# Altium PCB LED_PROJECT.PcbDoc
Units mil, origin at the board's own origin, x right, y up, seen from the top; angles counter-clockwise.
Board outline 1640 x 1140 mil, 2 copper layers (Top Layer, Bottom Layer); 7 components, 6 nets, 25 pads, 3 vias.
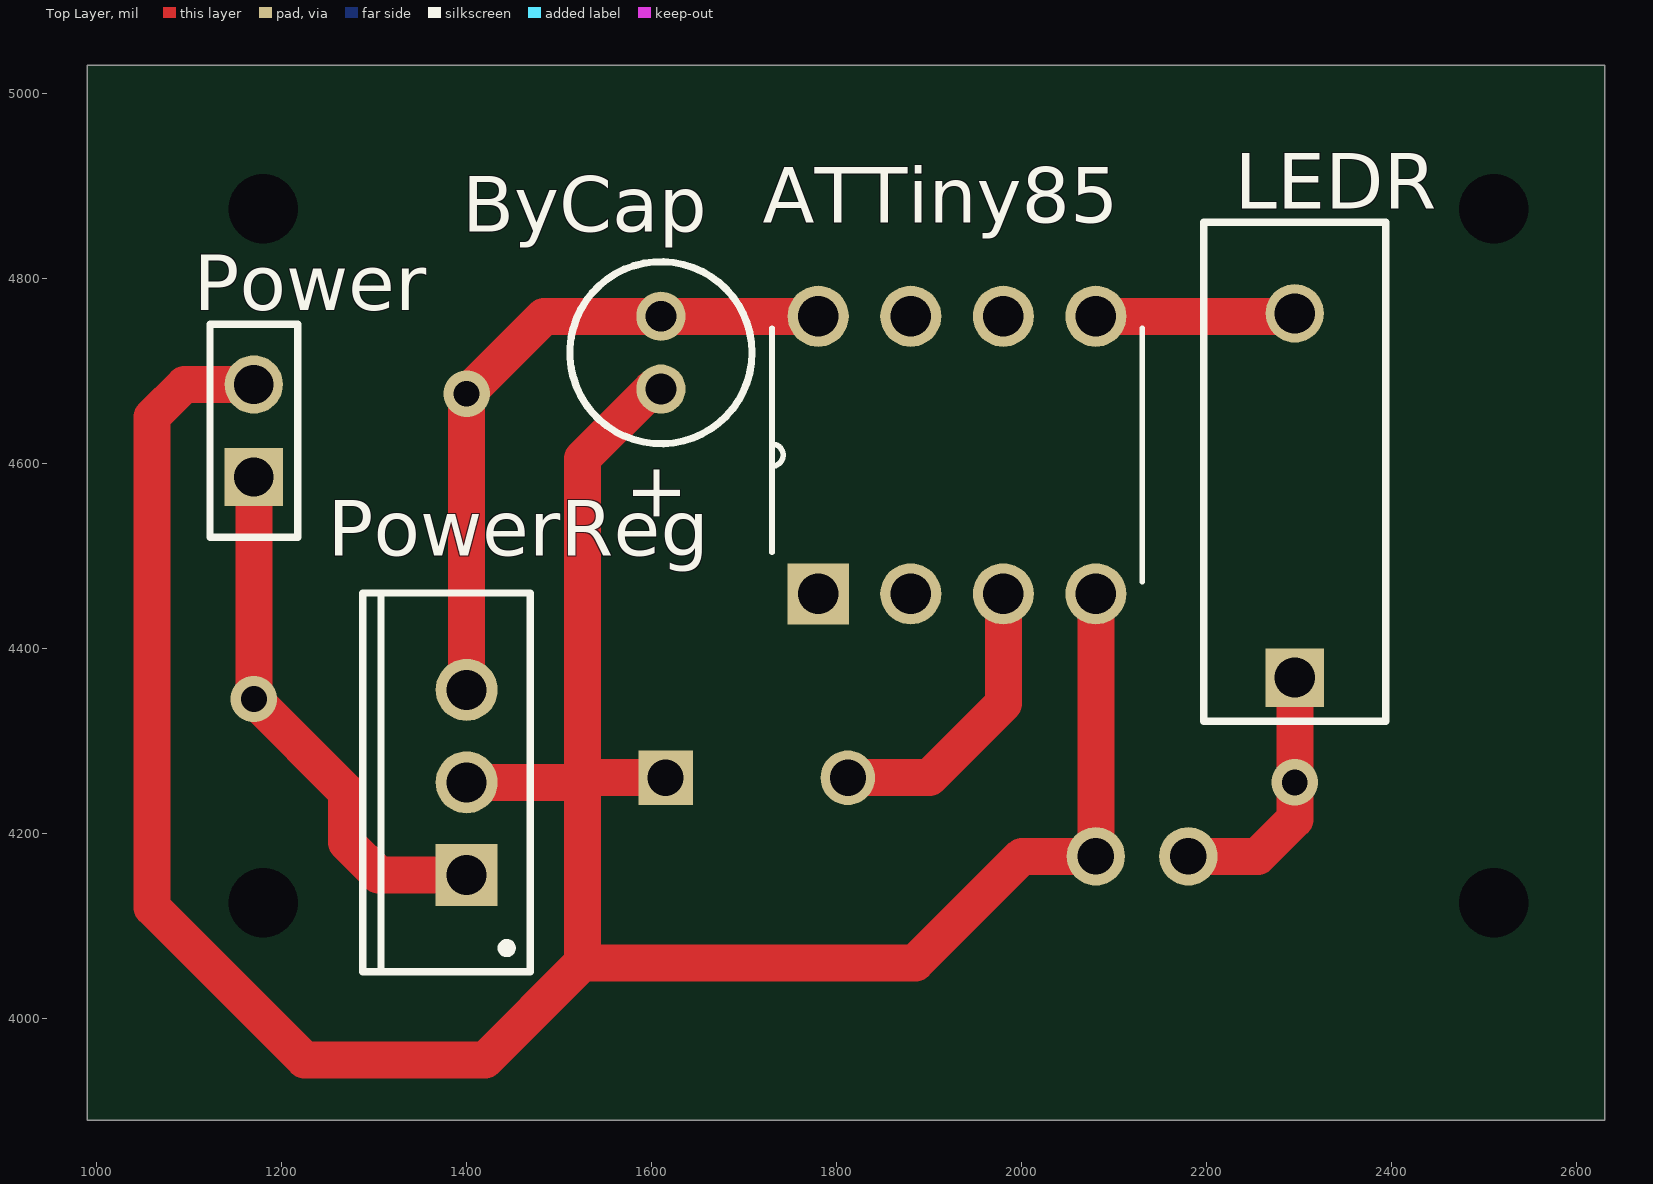
[diagram p0: Top Layer view]
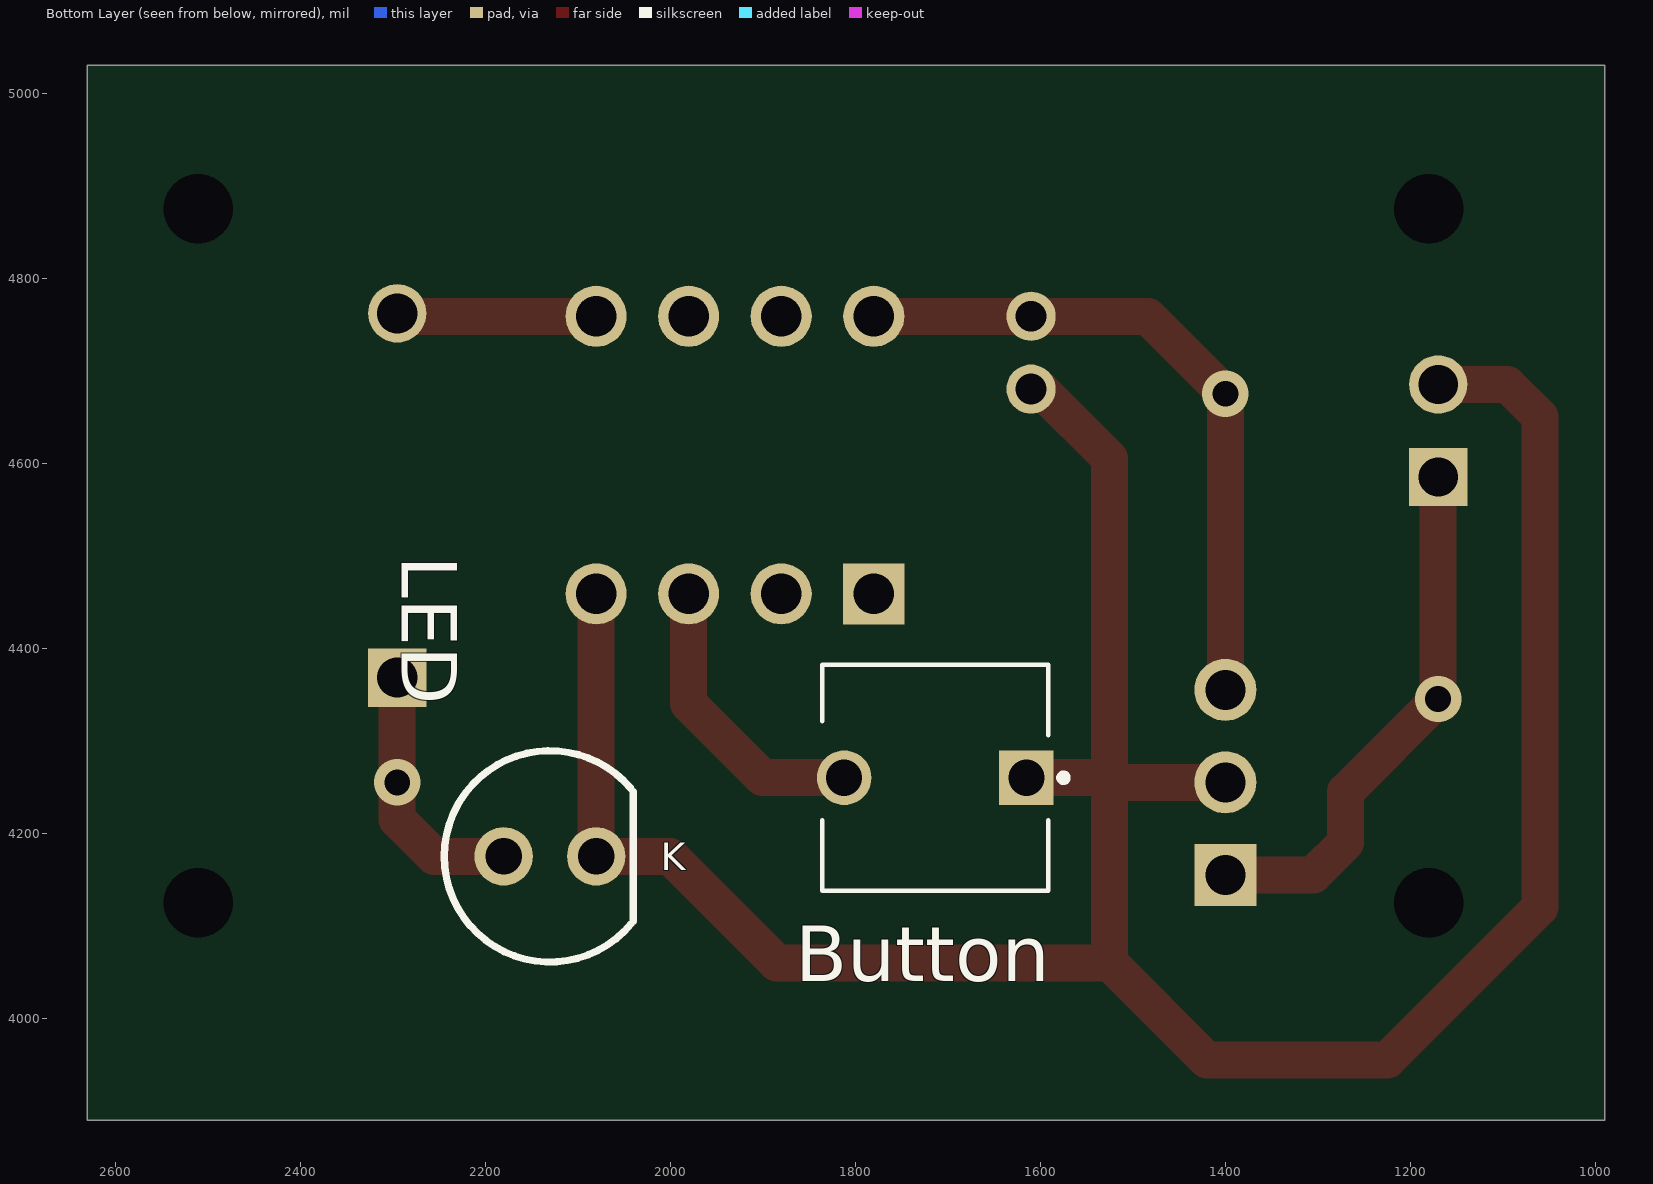
[diagram p1: Bottom Layer view, seen from below]

## Layer stack, top to bottom
Top Solder: solder mask 0.4, Solder Resist, Dk 3.5
Top Layer: signal copper 1.4
Dielectric 1: dielectric 12.6, FR-4, Dk 4.8
Bottom Layer: signal copper 1.4
Bottom Solder: solder mask 0.4, Solder Resist, Dk 3.5

## Board outline
990,5030 2630,5030 2630,3890 990,3890
cut-out: 940,3925
cut-out: 3040,3835

## Design rules (kind name [scope] priority, off if disabled: settings)
Clearance [All] p1: gap=10 ignorepadtopadclearanceinfootprint=FALSE except(0: Arc-Hole Track-Hole SMDPad-Hole THPad-Hole Via-Hole Fill-Hole Poly-Hole Region-Hole Text-Hole)
PolygonConnect [All] p1: connectstyle=Direct reliefconductorwidth=10 reliefentries=4 polygonreliefangle="90 Angle" airgapwidth=10
RoutingVias [All] p1: holewidth=28 width=50 viastyle="Through Hole" minholewidth=28 minwidth=50 maxholewidth=28 maxwidth=50
SolderMaskExpansion [All] p1: expansion=4
Width [All] p1: maxlimit=50 minlimit=20 preferedwidth=20 minimp=50.000000 maximp=50.000000 favimp=50.000000
30 further rules are at their usual default settings.

## Components (designator, comment, footprint, x,y, rotation, side; value= is the part's Value field where it differs from the comment)
ATTiny85 "ATTINY85-20PU" DIP254P762X533-8 2080,4758.74 r90 top
Button "147694-1" TE_FSM8JRT 1615,4260 r0 bottom
ByCap "81R0LFJ0511WPN081T" FHTE-8-0511-2_M 1610,4719.37 r270 top
LED "151053RS03000" "Type 5mm" 2130,4175 r180 bottom
LEDR "FMP300FRF73-82K" YAGO-FMP300-2_V2 2295,4565 r90 top
Power "PHF-102-01-L-S-002" SMTC-PHF-102-01-X-S-002 1170,4585 r90 top
PowerReg "L7805ACV" TO220 1400,4255 r90 top

## Footprints (in the part's own frame and the unit in brackets; to place one, negate y for a bottom-side part, rotate by r counter-clockwise, add the part's x,y. Pads: shape width x height; smd on the part's side, far side on the other; paste and mask are expansions set on the pad)
DIP254P762X533-8 [mil]
  rect 66x66 hole 44: 1(-300,300)
  round 66 hole 44: 2(-300,200) 3(-300,100) 4(-300,0) 5(0,0) 6(0,100) 7(0,200) 8(0,300)
  silkscreen extent -287,-50 -13,350
FHTE-8-0511-2_M [mm] "Through Hole Cap, 2-Leads, Dia 5mm, Body Length 11mm, IPC Low Density"
  round 1.35 hole 0.85: 2(-1,0) 2(1,0)
  silkscreen extent -2.5,-2.5 2.5,2.5, body extent -2.5,-2.5 2.5,2.5, height 11
SMTC-PHF-102-01-X-S-002 [mm] "Press Fit Socket Assembly, 1x2 Pins, Vertical, 2.54mm Pitch, Female"
  rect 1.6x1.6 hole 1.081: 1(0,0)
  round 1.6 hole 1.081: 2(2.54,0)
  silkscreen extent -1.65,-1.2 4.19,1.2, body extent -1.52,-1.21 4.06,1.21, height 8.51
TE_FSM8JRT [mil]
  rect 59x59 hole 39: 2(0,0)
  round 59 hole 39: 2(197,0)
  silkscreen extent -44,-122 220,122
TO220 [mm] "TO, Thru-Hole, Vertical, Heatsink Mounted; 3 In-Line Leads; Pitch 2.54 mm"
  rect 1.7x1.7 hole 1.1: 1(-2.54,0)
  round 1.7 hole 1.1: 2(0,0) 3(2.54,0)
  silkscreen extent -5.2,-1.75 5.2,2.85, body extent -5.25,-1.8 5.25,2.9, height 19.7
"Type 5mm" [mm] "THT, LED-5mm, 2pin- Body 5.8mm"
  round 1.6 hole 1: 2(-1.27,0) 2(1.27,0)
  silkscreen extent -2.9,-2.9 2.29,2.9, body extent -2.9,-2.9 2.5,2.9, height 11.7
YAGO-FMP300-2_V2 [mm] "Through Hole, 2-Leads, Dia 5mm, Body Length 15.5mm, Pin Spacing 10mm"
  rect 1.6x1.6 hole 1.1: 1(-5,0)
  round 1.6 hole 1.1: 2(5,0)
  silkscreen extent -6.2,-2.5 7.5,2.5, body extent -5.4,-2.49 7.49,2.5, height 17.9

## Part data
ATTiny85: "ATtiny Series 20 MHz 8 KB Flash 512 B SRAM 8-Bit Microcontroller - DIP-8", Package="DIP-8 Microchip", Availability=Unavailable, MF=Microchip, MP=ATTINY85-20PU, Price=None, SnapEDA_Link=https://www.snapeda.com/parts/ATTINY85-20PU/Microchip/view-part/?ref=snap
Button: library part FSM8JRT, "FSM8JRT=SWITCH,PUSHBUTTON,TACT", Contact_Current_Rating="50 mA", Package=None, Configuration_Pole-Throw="Single Pole - Single Throw", Digi-Key_Part_Number=450-2039-1-ND, Digi-Key_Purchase_URL=https://www.digikey.com/product-detail/en/te-connectivity-alcoswitch-switches/FSM8JRT/450-2039-1-ND/4146916?utm_source=snapeda&utm_medium=aggregator&utm_campaign=symbol, EU_RoHS_Compliance=Compliant, MF="TE Connectivity", MP=FSM8JRT, SnapEDA_Link=https://www.snapeda.com/parts/FSM8JRT/TE%20Connectivity%20ALCOSWITCH%20Switches/view-part/?ref=snap, TE_purchase_URL=https://www.te.com/usa-en/product-147694-1.html?te_bu=Cor&te_type=disp&te_campaign=seda_glo_cor-seda-global-disp-prtnr-fy19-seda-model-bom-cta_sma-317_1&elqCampaignId=32493
ByCap: library part CMP-0909-00001-1, "Aluminum Electrolytic Capacitor, 1 uF +/- 5%, 50 V, -40 to 105 degC, 2 Pin THD, Dia 5 mm, Body Length 11 mm, Tape and Reel", Manufacturer="Fenghuang Technology", Nominal Capacitance="1 uF", Operating Temperature="-40 to 105 degC", Seeve Color=Balck, Tolerance="+/- 5%", Voltage="50 V", ComponentLink1Description="Manufacturer URL", ComponentLink1URL=http://www.fenghua-advanced.com/, ComponentLink2Description=Datasheet, ComponentLink2URL=http://218.15.223.226:8089/BusinessProductPdf/ss_20130228152314.pdf, DatasheetVersion=Feb-13, Mounting Technology="Through Hole", PackageDescription="2-Pin Through Hole Cap, Dia 5 mm, Body Length 11 mm", PackageReference=8-0511-2, Packing="Tape and Reel", PartNumber=81R0LFJ0511WPN081T
LED: library part CMP-1489-00007-1, "THT LED round mono-color waterclear,  WL-TMRW ,Red", Emitting color=Red, Manufacturer="Wuerth Elektronik", ComponentLink1Description="Manufacturer URL", ComponentLink1URL=http://www.we-online.com, ComponentLink2Description=Datasheet, ComponentLink2URL=http://katalog.we-online.de/pbs/datasheet/7448042001.pdfhttp://katalog.we-online.de/pbs/datasheet/7448042001.pdfhttp://katalog.we-online.de/pbs/datasheet/7448042001.pdfhttp://katalog.we-online.de/pbs/datasheet/151053RS03000.pdf, PackageReference="Type 5mm", PartNumber=151053RS03000
LEDR: library part CMP-1257-00001-1, "Metal Film Resistor, 82 KOhm +/-1%, 3 W, -55 to 155 degC, 2-Pin THD, RoHS, Tape and Reel", Manufacturer=Yageo, Operating Temperature="-55 to 155 degC", Overload Voltage="1000 V Max.", Rated Power="3 W", Resistance="82 KOhm", Resistance Tolerance=+/-1%, Working Voltage="750 V Max.", ComponentLink1Description="Manufacturer URL", ComponentLink1URL=http://www.yageo.com/NewPortal/_en/index.jsp, ComponentLink2Description=Datasheet, ComponentLink2URL=http://www.yageo.com/documents/recent/Yageo%20LR_FMP_2013.pdf, ComponentLink3Description="Package Specification", ComponentLink3URL=http://www.yageo.com/documents/recent/Yageo%20LR_FMP_2013.pdf, DatasheetVersion=Apr-13, Mounting Technology="Through Hole", PackageDescription="2-Pin Axial Lead, Body 15.5 x 5 mm, Lead Spread 33 mm", Packing="Tape and Reel", PartNumber=FMP300FRF73-82K, RoHS=TRUE
Power: library part CMP-1023-00103-1, "Press Fit Socket, Through-hole, Vertical, -55 to 125 degC, 2.54 mm Pitch, 2-Pin, Female, RoHS", Manufacturer=Samtec, Temperature Range="-55 to 125 degC", ComponentLink1Description="Manufacturer URL", ComponentLink1URL=http://www.samtec.com, ComponentLink2Description=Datasheet, ComponentLink2URL=http://www.samtec.com/documents/webfiles/pdf/phf.pdf, ComponentLink3Description="Package Specification", ComponentLink3URL=http://www.samtec.com/documents/webfiles/cpdf/PHF-1XX-XX-X-X-XXX-MKT.pdf, DatasheetVersion=F-214, Mounting Technology=Through-hole, Orientation=Vertical, PackageDescription=".100 Press Fit Socket Assembly", PackageReference=PHF-102-01-X-S-002, PackageVersion="F, 9/2009", PartNumber=PHF-102-01-L-S-002, Pitch="2.54 mm", RoHS=True
PowerReg: library part CMP-0244-00484-1, "Positive Voltage Regulator, 5V, 3-Pin TO-220", ComponentLink1Description="Manufacturer URL", ComponentLink1URL=http://www.st.com, ComponentLink2Description=Datasheet, ComponentLink2URL=http://www.st.com/internet/com/TECHNICAL_RESOURCES/TECHNICAL_LITERATURE/DATASHEET/CD00000444.pdf, ComponentLink3Description="Package Specification", ComponentLink3URL=http://www.st.com/internet/com/TECHNICAL_RESOURCES/TECHNICAL_LITERATURE/PACKAGE_INFORMATION/CD00004649.pdf, DatasheetVersion=16/11/2011, PackageDescription="TO, Thru-Hole, Vertical, Heatsink Mounted; 3 In-Line Leads; Pitch 2.54 mm", PackageReference=TO220, PackageVersion=ver3.0

## Free pads (board coordinates)
  round 60 hole 75: 2(1180,4125) 2(1180,4875) 2(2510,4125) 2(2510,4875)

## Via types
v1: diameter 50, hole 28, Top Layer to Bottom Layer, 3 vias

## Nets (pads, with @x,y where several pads share a name; then routed paths per layer and width w, separated by ;. In a path a pad name is that pad's centre, name@x,y a point inside that pad or via, vN(x,y) a via of type N, cw(c..) or ccw(c..) an arc to the next point about the centre after c; other vN are vias at no path point)
GND: ATTiny85.4 Button.2@1615,4260 ByCap.2@1610,4680 LED.2@2080,4175 Power.2 PowerReg.2 | length 3002.9
  Top Layer w40: Power.2 1095,4685 1060,4650 1060,4120 1225,3955 1420,3955 1525,4060 ; PowerReg.2 1525,4255 ; Button.2@1610,4255 1615,4260 1530,4260 1525,4255 ; ByCap.2@1610,4680 1600,4680 1525,4605 1525,4255 ; ATTiny85.4 2080,4175 2000,4175 1885,4060 1525,4060 ; 1525,4060 1525,4255
NetATTiny85_3: ATTiny85.3 Button.2@1812,4260 | length 319.9
  Top Layer w40: Button.2@1812,4260 1900,4260 1980,4340 ATTiny85.3
NetATTiny85_5: ATTiny85.5 LEDR.2 | length 216.3
  Top Layer w40: ATTiny85.5 2291.89,4758.74 LEDR.2
NetATTiny85_8: ATTiny85.8 ByCap.2@1610,4758.74 PowerReg.3 | length 734.7
  Top Layer w40: PowerReg.3 v1(1400,4675) 1483.74,4758.74 1610,4758.74 ATTiny85.8
NetLED_2: LED.2@2180,4175 LEDR.1 | length 284.7
  Top Layer w40: LED.2@2180,4175 2255,4175 2295,4215 v1(2295,4255) LEDR.1
NetPower_1: Power.1 PowerReg.1 | length 580.9
  Top Layer w40: Power.1 v1(1170,4345) 1270,4245 1270,4190 1305,4155 PowerReg.1
pads on no net: ATTiny85.1 ATTiny85.2 ATTiny85.6 ATTiny85.7

## Polygon pours and split planes (outlines as drawn)
no net on Bottom Layer (solid, pour order 12): 1010,5010

## Text inside footprints (layer, text, board x,y; h text height)
ByCap: Top Overlay "+" at 1580,4601.26 h59.06 r270
LED: Mechanical 15 "K" at 2010,4160 h30; Bottom Overlay "K" at 2010,4160 h30